# Allegro board TPS61088.brd
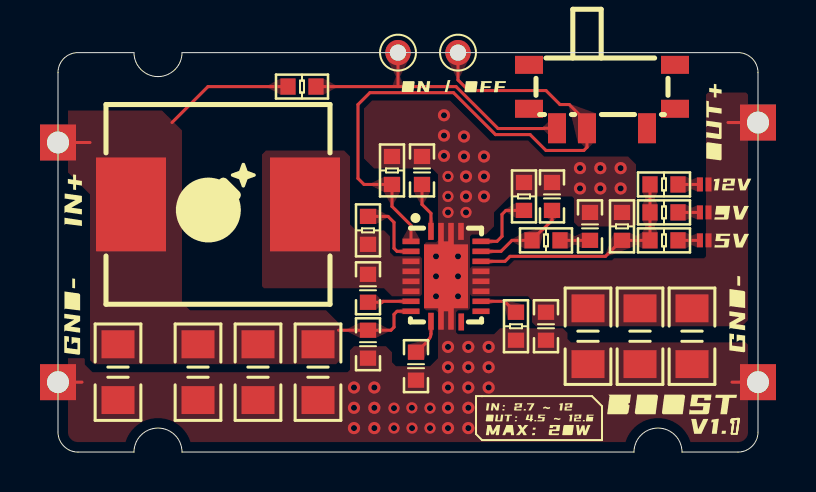
[diagram p0: board, top side]
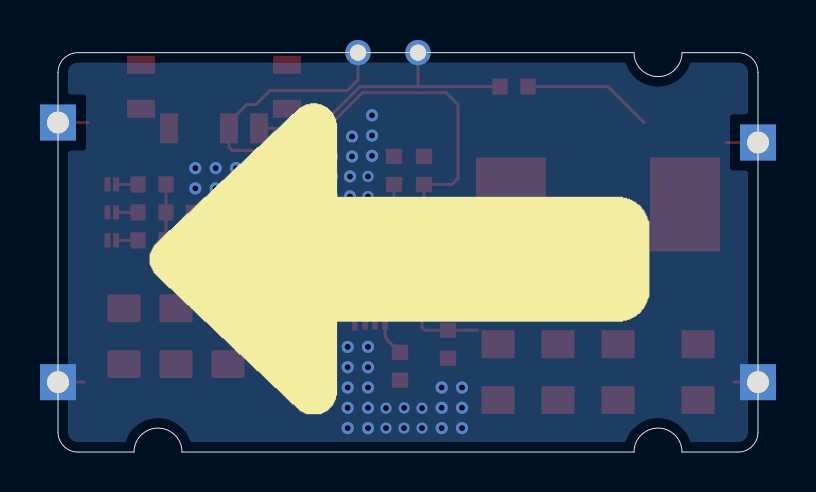
[diagram p1: board, bottom side, seen from below]

Outline 35 x 20 mm; copper layers: TOP, BOTTOM. Coordinates in mm from the lower left corner of the outline.
Outline path: 0,19 arc(0.29,19.71) 1,20 3.8,20 arc(5,18.8) 6.2,20 34,20 arc(34.71,19.71) 35,19 35,1 arc(34.71,0.29) 34,0 31.2,0 arc(30,1.2) 28.8,0 6.2,0 arc(5,1.2) 3.8,0 1,0 arc(0.29,0.29) 0,1 0,19

## Design rules (mm)
constraint set DEFAULT: min track width 0.152
net group N728315: nets N728315 N728381
net group N729347: nets N729347 N729351
net group N729005: nets N729005 N736576 N736626 N736633

## Placement (name value [footprint] x y rotation side)
C1  0.1uF  [C0603]  18.2 14.1 270 top
C2  47pF(NC)  [C0603]  24.7 12.8 90 top
C3  0.01uF  [C0603]  26.6 11.3 90 top
C4  0.1uF  [C0603]  15.5 8.2 270 top
C5  1uF  [C0603]  24.4 6.3 90 top
C6  22uF  [C1206]  26.5 5.8 90 top
C7  22uF  [C1206]  29.1 5.8 90 top
C8  22uF  [C1206]  31.7 5.8 90 top
C9  0.1uF  [C0603]  15.5 5.4 90 top
C10  47nF  [C0603]  17.9 4.3 270 top
C11  22uF  [C1206]  3 4 90 top
C12  22uF  [C1206]  7 4 90 top
C13  22uF  [C1206]  10 4 90 top
C14  22uF  [C1206]  13 4 90 top
L1  2.2uH  [IND-SMD_11X10_2MM]  8 12.4 0 top
NOREF  -  []  33.8 12 0 top
NOREF#2  -  []  41.1 0.3 0 top
NOREF#3  -  []  52.95 14.26 0 top
NOREF#4  -  []  1 0 90 top
NOREF#5  -  []  43.44 3.3 0 top
NOREF#6  -  []  24.09 1.71 0 top
NOREF#7  -  []  0 19 0 top
NOREF#8  -  []  26.9 -9.6 0 top
NOREF#9  -  []  51.7 9.45 0 top
NOREF#10  -  []  17.57 11.9 0 top
NOREF#11  -  []  57.1 7.5 0 top
NOREF#12  -  []  16.2 19.3 0 top
NOREF#13  -  []  33.8 13.4 0 top
NOREF#14  -  []  52.9 3.5 0 top
NOREF#15  -  []  33.8 10.6 0 top
NOREF#16  -  []  23.83 0.91 0 top
NOREF#17  -  []  23.56 2.37 0 top
R1  10K  [R0603]  12.2 18.3 180 top
R2  10K  [R0603]  16.7 14.1 270 top
R3  350K  [R0603]  30.3 13.4 0 top
R4  Short  [SHORT]  32.3 13.4 90 top
R5  100K  [R0603]  23.3 12.8 270 top
R6  255K  [R0603]  30.3 12 0 top
R7  Short  [SHORT]  32.3 12 90 top
R8  39K  [R0603]  28.2 11.3 270 top
R9  255K  [R0603]  15.5 11.1 90 top
R10  4.7k  [R0603]  24.4 10.6 180 top
R11  124K  [R0603]  30.3 10.6 0 top
R12  Short  [SHORT]  32.3 10.6 90 top
R13  10K(NC)  [R0603]  22.9 6.3 90 top
S1  SK-3296S-01-L3  [SW_SMD_SK-3296S]  27.2 17.8 180 top
TP1  HOLE  [TP_HOLE]  17 20 0 top
TP2  HOLE  [TP_HOLE]  20 20 0 top
TP3  HOLE  [M2_PAD]  35 16.5 0 top
TP4  HOLE  [M2_PAD]  0 15.5 0 top
TP5  HOLE  [M2_PAD]  0 3.5 0 top
TP6  HOLE  [M2_PAD]  35 3.5 0 top
U1  TPS61088RHLR  [VQFN20-4_6X3_6]  19.4 8.8 270 top

## Library data of the parts
C1-C14 = C
L1 = L
R1-R13 = R
S1 = SW_SMD_sk-3296s
TP1-TP6 = TP
U1 = TPS61088RHLT

## Footprints (pads in the part's own frame, mm; a bottom-side part is the same pattern mirrored in y, then rotated)
C0603
  rect 0.762x0.813 smd: 1(-0.7,0) 2(0.7,0)
C1206
  rect 1.397x1.651 smd: 1(-1.397,0) 2(1.397,0)
IND-SMD_11X10_2MM
  rect 3.5x4.7 smd: 1(-4.35,0) 2(4.35,0)
M2_PAD
  rect 1.8x1.8 hole 1.1: 1(0,0)
R0603
  rect 0.762x0.813 smd: 1(-0.7,0) 2(0.7,0)
SHORT
  rect 0.7x0.3 smd: 1(0,0.203) 2(0,-0.229)
SW_SMD_SK-3296S
  rect 0.9x1.5 smd: 1(-2.25,1.587) 2(0.75,1.587) 3(2.25,1.587)
  rect 1.4x0.9 smd: 4(-3.65,-1.587) 5(3.65,-1.587) 6(-3.65,0.612) 7(3.65,0.612)
TP_HOLE
  round 1.27 hole 0.813: 1(0,0)
VQFN20-4_6X3_6
  rect 0.85x0.28 smd: 1(-2.25,-0.752) 10(2.25,-0.752) 11(2.286,0.762) 20(-2.25,0.75)
  rect 0.28x0.85 smd: 2(-1.748,-1.75) 3(-1.248,-1.75) 4(-0.749,-1.75) 5(-0.248,-1.75) 6(0.252,-1.75) 7(0.752,-1.75) 8(1.252,-1.75) 9(1.752,-1.75) 12(1.752,1.75) 13(1.252,1.75) 14(0.75,1.748) 15(0.25,1.748) 16(-0.25,1.748) 17(-0.75,1.748) 18(-1.25,1.748) 19(-1.75,1.748)
  custom 5.35x2.2 smd: 21(0,0)

## Nets
AGND: C1.1 C2.2 C3.2 C5.1 C6.1 C7.1 C8.1 C9.1 C10.2 C11.1 C12.1 C13.1 C14.1 R2.1 R5.1 R8.1 R13.1 TP5.1 TP6.1 U1.20 U1.21
VIN: C9.2 C11.2 C12.2 C13.2 C14.2 L1.1 R1.2 TP4.1 U1.9
VOUT: C5.2 C6.2 C7.2 C8.2 R4.2 R7.2 R12.2 TP3.1 U1.14 U1.15 U1.16(\VOUT3\)
N728315: R9.2 U1.3
N728330: C4.1 L1.2 R9.1 U1.4 U1.5 U1.6 U1.7
N728381: C4.2 U1.8
N728814: C1.2 U1.1
N729005: R3.1 R6.1 R8.2 R11.1 U1.17
N729347: C3.1 R10.1
N729351: C2.1 R10.2 U1.18
N729460: R5.2 U1.19
N729490: C10.1 U1.10
N730115: R2.2 S1.2 TP2.1 U1.2
N730472: R1.1 S1.3 TP1.1
N731506: R13.2 U1.13
N736576: R11.2 R12.1
N736626: R3.2 R4.1
N736633: R6.2 R7.1

Pads without a net: S1 1 4 5 6 7; U1 11 12

## Via types
v1: diameter 0.61, hole 0.305, TOP to BOTTOM, 38 vias
v2: diameter 0.559, hole 0.305, TOP to BOTTOM, 13 vias

## Routing (per net, layer and track width the routed paths; a pad name or vN(x,y) marks a point on that pad's centre or on a via; arc(x,y) is an arc through that point)
AGND: length 2.5
  TOP w0.152: TP6.1 33.7,3.5 ; TP5.1 1.2,3.5
  vias: v1(14.8,3.23) v1(14.8,2.22) v1(14.8,1.2) v1(15.82,3.23) v1(15.82,2.22) v1(15.82,1.2) v1(19.3,16.86) v1(19.3,15.85) v1(19.3,14.83) v1(19.5,5.26) v1(19.5,4.25) v1(19.5,3.23) v1(19.5,2.22) v1(19.5,1.2) v1(20,9.8) v1(20,8.8) v1(20,7.8) v1(20.3,15.8) v1(20.3,14.8) v1(20.4,13.8) v1(20.4,12.8) v1(20.52,5.26) v1(20.52,4.25) v1(20.52,3.23) v1(20.52,2.22) v1(20.52,1.2) v1(21.3,14.8) v1(21.3,13.8) v1(21.3,12.8) v1(21.53,5.26) v1(21.53,4.25) v1(21.53,3.23) v1(26.1,14.22) v1(26.1,13.2) v1(27.12,14.22) v1(27.12,13.2) v1(28.13,14.22) v1(28.13,13.2) v2(16.8,2.2) v2(16.8,1.2) v2(17.69,2.21) v2(17.7,1.2) v2(18.6,2.2) v2(18.6,1.2) v2(18.9,9.8) v2(18.9,8.8) v2(18.9,7.8) v2(19.5,13.8) v2(19.5,12.8) v2(19.5,12) v2(20.4,12)
VIN: length 12.5
  TOP w0.152: R1.2 7.5,18.3 5.7,16.5 ; TP4.1 1.6,15.5 ; U1.9 16.95,7.05 16.8,6.9 16.8,6.25 16.65,6.1 C9.2 14.03,6.1
VOUT: length 1.5
  TOP w0.152: TP3.1 33.5,16.5
N728315: length 3.6
  TOP w0.152: R9.2 16.5,11.8 16.8,11.5 16.8,10.2 16.95,10.05 U1.3
N728381: length 2.2
  TOP w0.152: C4.2 16.2,7.5 16.25,7.55 U1.8
N728814: length 2.5
  TOP w0.152: U1.1 18.65,11.95 18.2,12.4 C1.2
N729005: length 11.7
  TOP w0.152: R3.1 R6.1 R11.1 R8.2 28.17,10.6 27.37,9.8 22.6,9.8 22.35,9.55 U1.17
N729347: length 1.5
  TOP w0.152: R10.1 C3.1
N729351: length 4.7
  TOP w0.152: C2.1 24.7,11.6 24.25,11.15 24.22,11.15 23.7,10.63 R10.2 22.7,10.6 22.15,10.05 U1.18
N729460: length 3.4
  TOP w0.152: U1.19 21.95,10.55 22.2,10.8 22.2,11.9 22.4,12.1 R5.2
N729490: length 1.9
  TOP w0.152: U1.10 18.65,5.92 arc(18.62,5.76) 18.52,5.62 18.52,5.6 17.93,5 C10.1
N730115: length 31.7
  TOP w0.152: TP2.1 20,18.63 20.53,18.1 24.4,18.1 25.1,17.4 25.56,17.4 26.45,16.51 S1.2 26.45,15.26 26.29,15.1 24.4,15.1 23.6,15.9 21.87,15.9 19.77,18 15.6,18 15,17.4 15,13.7 15.3,13.4 R2.2 16.7,12.3 17.65,11.35 U1.2
N730472: length 14.6
  TOP w0.152: R1.1 17,18.3 ; 17,18.3 19.9,18.3 22,16.2 24.28,16.2 24.3,16.21 S1.3 ; 17,18.3 TP1.1
N731506: length 2
  TOP w0.152: R13.2 22.87,7 22.33,7.55 U1.13
N736576: length 1.1
  TOP w0.152: R11.2 R12.1
N736626: length 1.1
  TOP w0.152: R3.2 R4.1
N736633: length 1.1
  TOP w0.152: R6.2 R7.1

## Copper pours and planes (outline as drawn; the poured copper is in the pictures)
AGND on TOP: 34.5,5.38 34.5,1 34.35,0.65 34,0.5 31.62,0.5 31.01,1.37 30,1.7 28.99,1.37 28.38,0.5 6.62,0.5 6.01,1.37 5,1.7 3.99,1.37 3.38,0.5 1,0.5 0.65,0.65 0.5,1 0.5,4.7 1.3,4.7 1.34,4.66 1.34,4.38 1.72,4 14.48,4 14.6,4.12 14.6,5.1 14.8,5.3 16.4,5.3 16.7,5 16.7,4.5 16.9,4.3 18.6,4.3 19,4.7 19,7 18.9,7.1 18.4,7.1 18.3,7.2 18.3,10.4 18.4,10.5 18.9,10.5 19,10.6 19,13.9 18.7,14.2 15.8,14.2 15.3,14.7 15.3,17.2 15.7,17.6 19.6,17.6 21.6,15.6 23.5,15.6 24.3,14.8 28.5,14.8 28.9,14.4 28.9,11.4 28.8,11.3 26,11.3 25.8,11.5 25.8,12.7 25.7,12.8 22.6,12.8 21.8,12 21.8,11.3 21.4,10.9 20.7,10.9 20.6,10.8 20.6,7.2 20.5,7.1 20,7.1 19.9,7 19.9,6 20,5.9 21.8,5.9 22.1,6.2 25.24,6.2 25.47,5.97 25.47,5.67 25.65,5.49 34.39,5.49
AGND on BOTTOM: 34,19.5 34.35,19.35 34.5,19 34.5,18 34.4,17.9 33.7,17.9 33.6,17.8 33.6,15.2 33.7,15.1 34.4,15.1 34.5,15 34.5,1 34.35,0.65 34,0.5 31.62,0.5 31.01,1.37 30,1.7 28.99,1.37 28.38,0.5 6.62,0.5 6.01,1.37 5,1.7 3.99,1.37 3.38,0.5 1,0.5 0.65,0.65 0.5,1 0.5,14 0.6,14.1 1.3,14.1 1.4,14.2 1.4,16.8 1.3,16.9 0.6,16.9 0.5,17 0.5,19 0.65,19.35 1,19.5 3.38,19.5 3.99,18.63 5,18.3 6.01,18.63 6.62,19.5
VIN on TOP: 0.5,17.1 5.2,17.1 6.2,16.1 6.2,7.5 6.6,7.1 13.4,7.1 14.1,6.4 14.1,4.6 13.9,4.4 1.8,4.4 1.6,4.6 1.6,12.9 0.5,14
VOUT on TOP: 32.5,18 34.4,18 34.5,17.9 34.5,6.6 34.2,6.3 23.9,6.3 23.7,6.5 23.7,7.6 23.5,7.8 20.7,7.8 20.6,7.9 20.6,9.2 20.7,9.3 22.5,9.3 22.8,9.6 27.7,9.6 27.8,9.7 32.3,9.7 32.4,9.8 32.4,17.9
N728330 on TOP: 16.7,7.8 18.1,7.8 18.2,7.9 18.2,9.7 18.1,9.8 16.8,9.8 16.6,10 16.6,10.8 16.3,11.1 14.9,11.1 14.6,11.4 14.6,14.8 14.3,15.1 10.4,15.1 10.2,14.9 10.2,8.3 10.3,8.2 16.3,8.2

Small or netless copper shapes (teardrops, artwork), in the pictures only: 50 on TOP
